# EAGLE board DressCode (EAGLE 6.4)
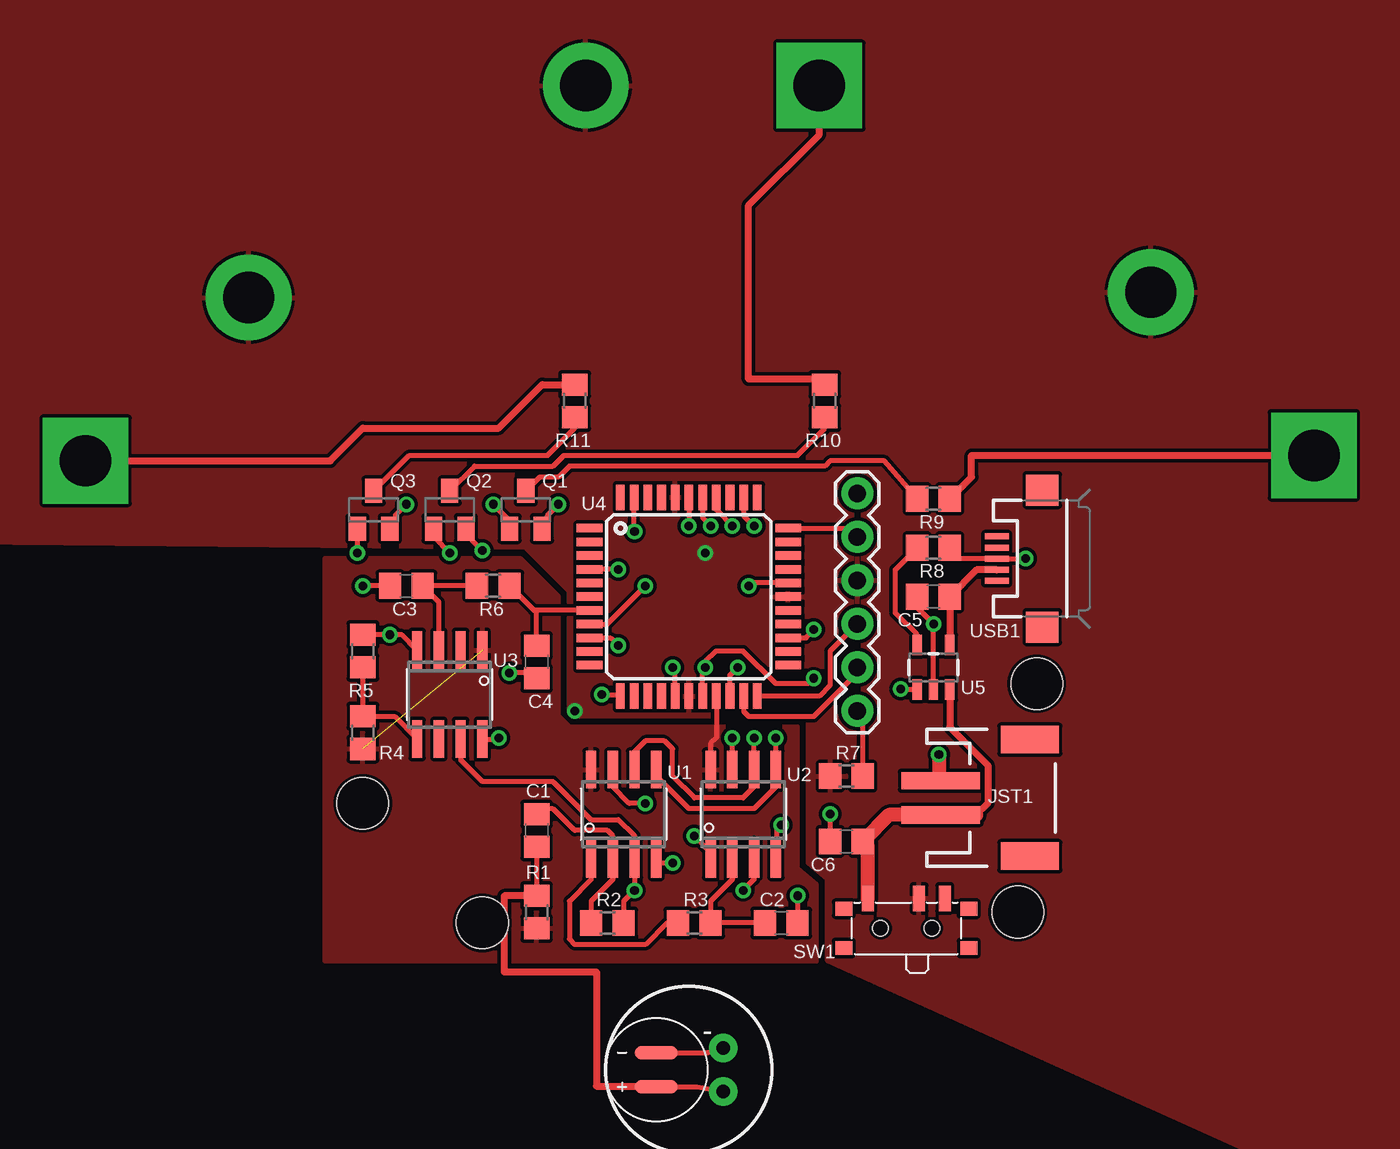
[diagram p0: board, top side]
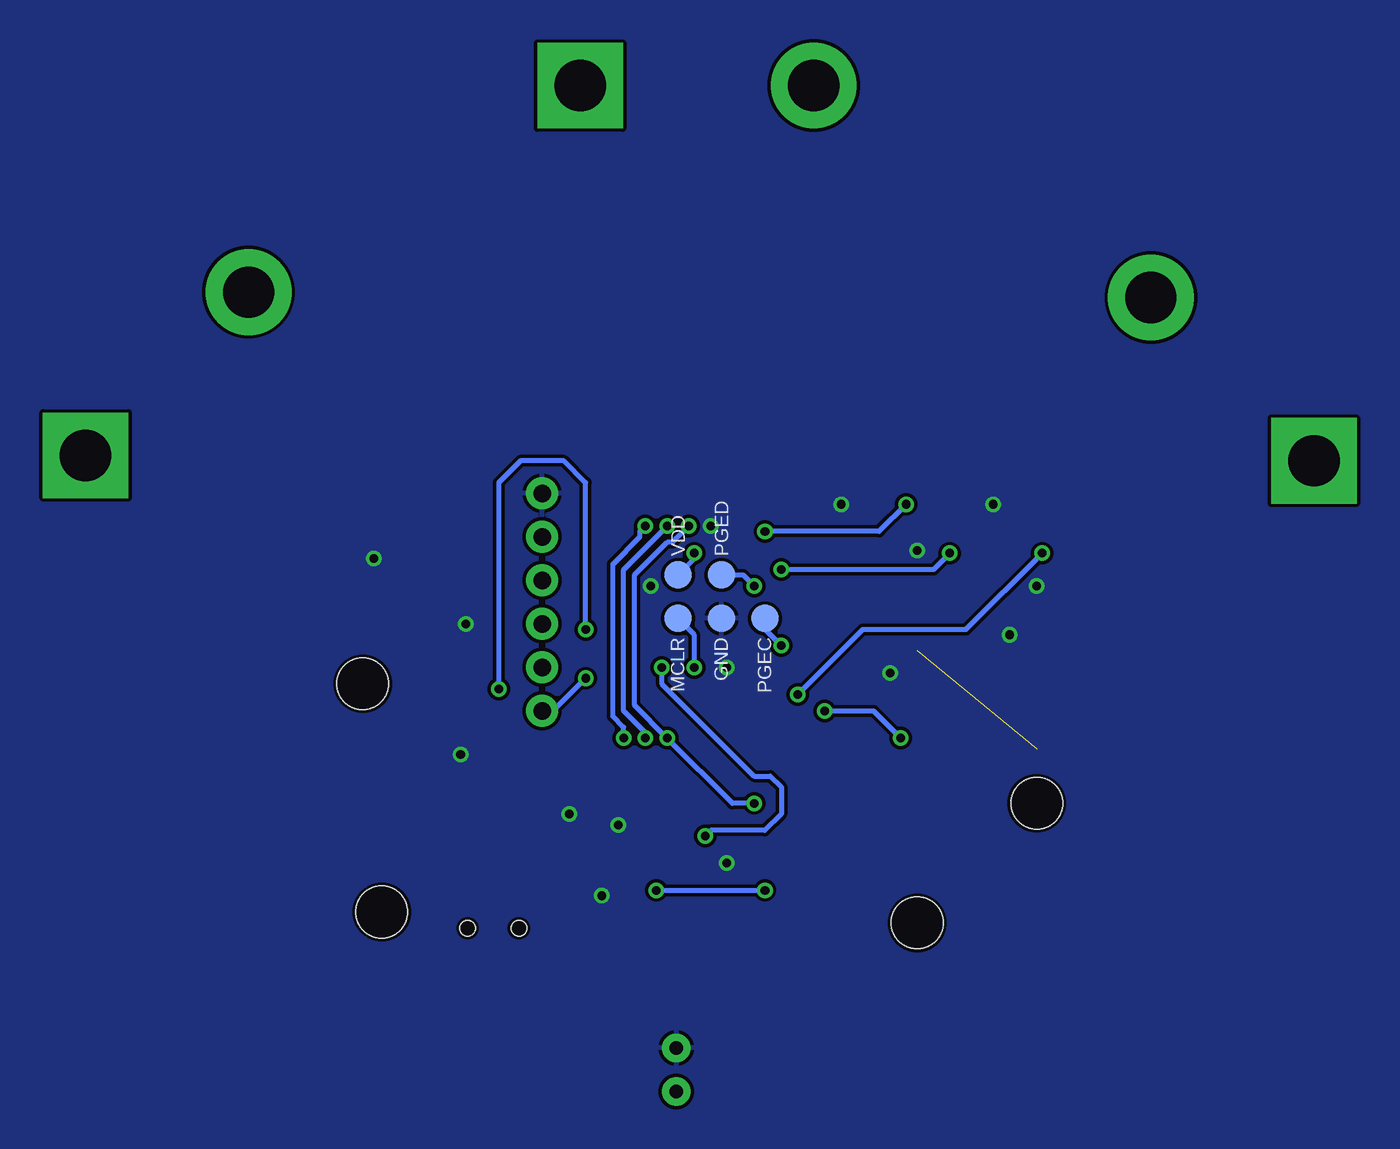
[diagram p1: board, bottom side, seen from below]

No outline drawn. Coordinates in mm, seen from the top.
Copper layers (1*16): Top 0.035mm / dielectric 1.5mm / Bottom 0.035mm
Design rules "default *": minimum track width 0.2mm, minimum drill 0.5mm, track to track 0.2mm, track to pad 0.2mm, pad to pad 0.2mm, via to via 0.2mm, smd to smd 0.2mm, copper to edge 0.2mm, drill to drill 0.3mm, minimum pad ring 10mil, minimum via ring 8mil, stop-mask expansion 4mil, vias tented up to drill 1mm, thermal gap 0.2mm
Holes 3 mm at 29.84,26.04 36.83,19.05 68.1,19.68 69.22,33.02

## Footprints (pad centres in the part's own frame; a part is rotated, then mirrored left to right if it is on the bottom)
C0805 = smd 1.3 x 1.5: 1 -0.95,0; 2 0.95,0
TP16R = smd 1.6 x 1.6: TP 0,0
1X06 = drill 1.016 pad 1.88: 1 0,0; 2 2.54,0; 3 5.08,0; 4 7.62,0; 5 10.16,0; 6 12.7,0
JST-2-SMD = smd 1 x 4.6: 1 -1,-3.7; 2 1,-3.7 | smd 1.6 x 3.4: NC1 -3.4,1.5; NC2 3.4,1.5
MIC-9.7MM = drill 0.8 pad 1.676: 1 -2,1.27; 2 -2,-1.27
MIC-SMD = smd 2.5 x 0.8: + 0,-1; - 0,1
SOT23 = smd 1 x 1.4: 1 -0.95,-1.1; 2 0.95,-1.1; 3 0,1.1
R0805 = smd 1.3 x 1.5: 1 -0.95,0; 2 0.95,0
PCM12SMTR = smd 0.7 x 1.5: 1 -2.25,1.75; 2 0.75,1.75; 3 2.25,1.75 | smd 1 x 0.8: A -3.65,-1.15; B -3.65,1.15; C 3.65,1.15; D 3.65,-1.15 | hole 0.9: 1.5,0; -1.5,0
SOIC-8 = smd 0.6 x 2.2: 1 -1.905,-2.6; 2 -0.635,-2.6; 3 0.635,-2.6; 4 1.905,-2.6; 5 1.905,2.6; 6 0.635,2.6; 7 -0.635,2.6; 8 -1.905,2.6
TQFP44 = smd 1.5 x 0.5: 1 -5.8,4; 2 -5.8,3.2; 3 -5.8,2.4; 4 -5.8,1.6; 5 -5.8,0.8; 6 -5.8,0; 7 -5.8,-0.8; 8 -5.8,-1.6; 9 -5.8,-2.4; 10 -5.8,-3.2; 11 -5.8,-4; 23 5.8,-4; 24 5.8,-3.2; 25 5.8,-2.4; 26 5.8,-1.6; 27 5.8,-0.8; 28 5.8,0; 29 5.8,0.8; 30 5.8,1.6; 31 5.8,2.4; 32 5.8,3.2; 33 5.8,4 | smd 0.5 x 1.5: 12 -4,-5.8; 13 -3.2,-5.8; 14 -2.4,-5.8; 15 -1.6,-5.8; 16 -0.8,-5.8; 17 0,-5.8; 18 0.8,-5.8; 19 1.6,-5.8; 20 2.4,-5.8; 21 3.2,-5.8; 22 4,-5.8; 34 4,5.8; 35 3.2,5.8; 36 2.4,5.8; 37 1.6,5.8; 38 0.8,5.8; 39 0,5.8; 40 -0.8,5.8; 41 -1.6,5.8; 42 -2.4,5.8; 43 -3.2,5.8; 44 -4,5.8
SOT23-5 = smd 0.55 x 1.2: 1 -0.95,-1.3; 2 0,-1.3; 3 0.95,-1.3; 4 0.95,1.3; 5 -0.95,1.3
DRESSCODE_SEW_PAD_CIRC = drill 3 pad 5: 1 0,0
DRESSCODE_SEW_PAD_SQR = drill 3 pad 5 square: 1 0,0
USB-MICROB = smd 0.35 x 1.4: D+ 0,2.65; D- -0.65,2.65; GND 1.3,2.65; ID 0.65,2.65; VBUS -1.3,2.65 | smd 1.8 x 1.9: MT1 -4,0; MT2 4,0

## Placement (x,y rotation side)
C1  10u  [C0805]  40.01,24.45 90 top
C2  10n  [C0805]  54.29,19.05 0 top
C3  10u  [C0805]  32.38,38.73 0 top
C4  10u  [C0805]  40.01,34.29 90 top
C5  10u  [C0805]  63.18,38.1 0 top
C6  10u  [C0805]  58.1,23.81 0 top
GND  TPTP16R  [TP16R]  48.26,36.83 90 bottom
JP1  [1X06]  58.74,44.13 270 top
JST1  [JST-2-SMD]  67.31,26.35 270 top
M1  MIC9.7MM  [MIC-9.7MM]  48.9,10.48 180 top
M2  MIC6MM  [MIC-SMD]  46.99,10.48 0 top
MCLR  TPTP16R  [TP16R]  50.8,36.83 90 bottom
PGEC  TPTP16R  [TP16R]  45.72,36.83 90 bottom
PGED  TPTP16R  [TP16R]  48.26,39.37 90 bottom
Q1  2N7002  [SOT23]  39.37,43.18 0 top
Q2  2N7002  [SOT23]  34.92,43.18 0 top
Q3  2N7002  [SOT23]  30.48,43.18 0 top
R1  2.2k  [R0805]  40.01,19.68 270 top
R2  2.2k  [R0805]  44.13,19.05 0 top
R3  2.2k  [R0805]  49.21,19.05 0 top
R4  2.2k  [R0805]  29.84,30.16 270 top
R5  2.2k  [R0805]  29.84,34.92 270 top
R6  2.2k  [R0805]  37.47,38.73 180 top
R7  2.2k  [R0805]  58.1,27.62 180 top
R8  2.2k  [R0805]  63.18,40.96 180 top
R9  100R  [R0805]  63.18,43.81 0 top
R10  100R  [R0805]  56.83,49.53 90 top
R11  100R  [R0805]  42.23,49.53 90 top
SW1  PCM12SMTR  [PCM12SMTR]  61.59,18.73 0 top
U1  MCP6S21  [SOIC-8]  45.09,25.4 0 top
U2  MCP6S21  [SOIC-8]  52.07,25.4 0 top
U3  MCP6G02  [SOIC-8]  34.92,32.38 180 top
U4  PIC24FV32KA304-I/PT  [TQFP44]  48.9,38.1 0 top
U5  MCP73832T-2ACI/OT  [SOT23-5]  63.18,33.97 0 top
U$1  [OSHW_LOGO_6MM_BOTTOM]  69.53,25.72 0 bottom
U$2  [DRESSCODE-OUTLINE1]  6.67,2.86 0 top
U$4  DRESSCODE_SEW_PADC  [DRESSCODE_SEW_PAD_CIRC]  75.88,55.88 0 top
U$5  DRESSCODE_SEW_PADC  [DRESSCODE_SEW_PAD_CIRC]  23.18,55.56 90 top
U$6  DRESSCODE_SEW_PADC  [DRESSCODE_SEW_PAD_CIRC]  42.86,67.94 90 top
U$7  DRESSCODE_SEW_PADS  [DRESSCODE_SEW_PAD_SQR]  85.41,46.35 90 top
U$8  DRESSCODE_SEW_PADS  [DRESSCODE_SEW_PAD_SQR]  56.52,67.94 0 top
U$9  [DRESSCODE_LOGO]  31.29,21.18 0 top
U$10  DRESSCODE_SEW_PADS  [DRESSCODE_SEW_PAD_SQR]  13.65,46.04 0 top
USB1  USB-MICROB  [USB-MICROB]  69.53,40.32 90 top
VDD  TPTP16R  [TP16R]  50.8,39.37 90 bottom

## Library data of the parts
C1-C6 R1-R11 = rcl
GND MCLR PGEC PGED VDD = testpad
JP1 M1 = SparkFun
JST1 U5 USB1 = SparkFun_08_2011
M2 U1-U4 U$1 U$4-U$10 = x-io
Q1-Q3 = transistor-small-signal
SW1 = SparkFun0modified
U$2 = hannah

## Nets
ADC: U2.1 U4.20
AVDD: R1.2 R4.2 U1.8 U2.8 U3.1 U4.19
AVDD_REF: C4.2 R6.1 U4.7
BATT: C6.2 JST1.2 SW1.1 U5.3
CS: U1.5 U2.5 U4.35
FTDI_RX: JP1.5 U4.21
FTDI_TX: JP1.4 U4.22
GND: C2.2 C3.1 C4.1 C5.1 C6.1 GND.TP JP1.1 JST1.1 M1.2 M2.- Q1.2 Q2.2 Q3.2 R5.1 R8.1 U1.4 U2.4 U3.4 U4.16 U4.29 U4.39 U5.2 USB1.D+
MCLR: JP1.6 MCLR.TP R7.1 U4.18
N$1: C1.1 M1.1 M2.+ R1.1
N$2: C1.2 R2.1 U1.2
N$3: C2.1 R3.2 U2.2
N$4: R3.1 U1.1
N$5: C3.2 R6.2 U3.3
N$6: R4.1 R5.2 U3.5
N$9: Q1.3 R9.1
N$10: Q2.3 R10.1
N$11: Q3.3 R11.1
N$12: R9.2 U$7.1
N$13: R10.2 U$8.1
N$14: R11.2 U$10.1
N$15: R8.2 U5.5
PGEC: PGEC.TP U4.9
PGED: PGED.TP U4.8
PWM1: Q1.1 U4.43
PWM2: Q2.1 U4.4
PWM3: Q3.1 U4.12
RB4: JP1.2 U4.33
SI: U1.6 U2.6 U4.37
SLK: U1.7 U2.7 U4.38
STAT: U4.25 U5.1
USB1: C5.2 U5.4 USB1.D-
VDD: JP1.3 R7.2 SW1.2 U3.8 U4.17 U4.28 U4.40 U$4.1 U$5.1 U$6.1 VDD.TP
VREF: R2.2 U1.3 U2.3 U3.7

## Tracks (layer width: path | path; a pad name or v marks a point on that pad's centre or on a via)
ADC  (via drill 0.5)
  Top 0.305: U4.20 51.3,33.52 v51.75,33.97 | U2.1 50.16,23.18 v49.21,24.13
  Bottom 0.305: v51.75,33.97 51.75,33.02 46.35,27.62 45.4,27.62 44.77,26.99 44.77,25.4 45.72,24.45 48.9,24.45 v49.21,24.13
AVDD  (1 unrouted)
  Top 0.305: U4.19 50.49,29.86 50.16,29.53 U2.8
  pour Top: 27.62,16.83 56.36,16.83 56.36,21.27 55.24,22.23 55.24,30.48 41.91,30.48 41.27,31.11 41.27,38.1 39.05,40.32 27.62,40.32
AVDD_REF
  Top 0.305: U4.7 40.01,37.3 | 40.01,37.3 39.85,37.3 R6.1 | C4.2 40.01,37.3
BATT
  Top 0.406: U5.3 64.13,30.48 66.36,28.26 66.36,26.04 65.67,25.35
  Top 0.813: SW1.1 59.34,23.52 C6.2 60.59,25.35 JST1.2 65.67,25.35
CS  (via drill 0.5)
  Top 0.305: U4.35 52.09,42.84 v52.7,42.23 | v53.98,29.84 U2.5 53.98,26.99 52.7,25.72 48.9,25.72 46.99,27.62 U1.5
  Bottom 0.305: v53.98,29.84 53.98,30.48 54.61,31.11 54.61,40.01 53.02,41.59 53.02,41.91 v52.7,42.23
FTDI_RX
  Top 0.305: U4.21 52.09,31.41 52.39,31.11 56.2,31.11 58.42,33.34 58.42,33.66 JP1.5
FTDI_TX
  Top 0.305: JP1.4 57.15,34.92 57.15,32.94 56.52,32.3 U4.22
GND  (via drill 0.5)
  Top 0.305: C3.1 v29.84,38.73 | U4.39 v48.9,42.23 | U4.16 48.09,33.82 v47.94,33.97 | Q3.2 31.75,42.4 31.75,42.86 v32.38,43.5 | Q2.2 36.2,42.4 36.2,41.43 v36.83,40.8 | Q1.2 40.64,42.4 40.64,42.86 v41.27,43.5 | v47.94,22.54 47.25,22.54 U1.4 | U2.4 54.03,22.86 54.03,24.51 v54.29,24.77 | v55.24,20.64 C2.2 | M2.- 49.99,11.48 M1.2 | C4.1 39.69,33.66 v38.42,33.66 | U3.4 32.13,35.88 v31.43,35.88 | v31.43,35.88 R5.1 | U4.29 52.55,38.9 arc90 v52.39,38.73 | v68.58,40.32 USB1.D+ 64.77,40.32 R8.1 | 57.47,23.81 C6.1 v57.15,25.4 | v31.43,35.88 | U5.2 v63.18,36.51 62.23,37.46 C5.1
  Top 0.813: v63.5,28.89 63.5,27.46 JST1.1
  pour Bottom: 6.67,3.17 90.49,1.91 93.03,76.83 5.71,75.25
MCLR  (via drill 0.5)
  Top 0.305: U4.18 49.7,33.81 v49.85,33.97 49.85,34.29 50.48,34.92 52.07,34.92 53.98,33.02 55.88,33.02 v56.2,33.34 | R7.1 59.05,31.12 JP1.6
  Bottom 0.305: v49.85,33.97 49.85,35.88 MCLR.TP | v56.2,33.34 58.1,31.43 JP1.6
N$1
  Top 0.305: C1.1 R1.1 | M2.+ 49.35,9.48 M1.1
  Top 0.406: R1.1 38.1,20.64 38.1,16.19 43.5,16.19 43.5,9.53 46.99,9.53 M2.+
N$2
  Top 0.305: 43.5,19.36 R2.1 43.18,20.32 44.45,21.59 U1.2 44.45,24.13 44.13,24.45 42.23,24.45 40.96,25.71 40.32,25.71 C1.2
N$3
  Top 0.305: C2.1 R3.2 50.16,20.32 51.44,21.59 U2.2
N$4
  Top 0.305: R3.1 47.62,19.05 46.35,17.78 42.23,17.78 41.91,18.1 41.91,20.32 43.18,21.59 U1.1
N$5
  Top 0.305: U3.3 34.29,37.78 C3.2 R6.2
N$6
  Top 0.305: R5.2 R4.1 31.69,31.11 U3.5
N$9
  Top 0.305: R9.1 60.33,46.04 57.15,46.04 56.83,45.72 41.91,45.72 41.27,45.09 40.17,45.09 Q1.3
N$10
  Top 0.305: Q2.3 36.37,45.72 40.96,45.72 41.59,46.35 55.24,46.35 56.83,47.94 R10.1
N$11
  Top 0.305: Q3.3 32.55,46.35 40.64,46.35 42.23,47.94 R11.1
N$12
  Top 0.406: R9.2 65.41,45.09 65.41,46.35 U$7.1
N$13
  Top 0.406: R10.2 56.51,50.8 52.39,50.8 52.39,60.96 56.52,65.09 U$8.1
N$14
  Top 0.406: U$10.1 27.94,46.04 29.84,47.94 37.78,47.94 40.32,50.48 R11.2
N$15
  Top 0.305: U5.5 62.23,35.88 60.96,37.15 60.96,39.69 R8.2
PGEC  (via drill 0.5)
  Top 0.305: U4.9 44.31,35.7 v44.77,35.24
  Bottom 0.305: v44.77,35.24 45.72,36.2 PGEC.TP
PGED  (via drill 0.5)
  Top 0.305: U4.8 44.12,36.5 v46.35,38.73
  Bottom 0.305: PGED.TP 46.99,39.37 v46.35,38.73
PWM1  (via drill 0.5)
  Top 0.305: Q1.1 38.42,42.54 v37.47,43.5 | v45.72,41.91 45.7,41.94 U4.43
  Bottom 0.305: v37.47,43.5 39.05,41.91 v45.72,41.91
PWM2  (via drill 0.5)
  Top 0.305: v44.77,39.69 44.76,39.7 U4.4 | Q2.1 33.98,41.59 v34.92,40.64
  Bottom 0.305: v44.77,39.69 35.88,39.69 v34.92,40.64
PWM3  (via drill 0.5)
  Top 0.305: Q3.1 v29.53,40.64 | v43.81,32.38 44.81,32.38 U4.12
  Bottom 0.305: v43.81,32.38 40.01,36.2 33.97,36.2 v29.53,40.64
RB4
  Top 0.305: U4.33 58.23,42.1 JP1.2
SI  (via drill 0.5)
  Top 0.305: U4.37 50.49,43.17 v51.44,42.23 | v52.7,29.84 U2.6 52.7,26.99 52.07,26.35 49.21,26.35 47.94,27.62 47.94,29.21 47.47,29.69 46.35,29.69 45.72,29.05 U1.6
  Bottom 0.305: v52.7,29.84 52.7,30.16 53.98,31.43 53.98,39.69 v51.44,42.23
SLK  (via drill 0.5)
  Top 0.305: U4.38 49.7,42.7 v50.16,42.23 | U2.7 v51.44,29.84 | v46.35,26.04 45.4,26.04 44.45,26.99 U1.7
  Bottom 0.305: v50.16,42.23 51.12,41.27 51.44,41.27 53.34,39.37 53.34,31.75 v51.44,29.84 47.62,26.04 v46.35,26.04
STAT  (via drill 0.5)
  Top 0.305: U4.25 55.74,35.7 v56.2,36.2 | v61.28,32.7 62.2,32.7 U5.1
  Bottom 0.305: v56.2,36.2 56.2,44.77 57.47,46.04 60.01,46.04 61.28,44.77 v61.28,32.7
USB1
  Top 0.406: U5.4 C5.2 65.7,39.67 USB1.D-
VDD  (via drill 0.5)
  Top 0.305: U3.8 37.72,29.79 v37.78,29.84
  Bottom 0.305: v42.23,31.43 39.37,31.43 v37.78,29.84 | v49.85,40.64 49.85,40.32 VDD.TP
  pour Top: 90.81,1.59 56.99,16.83 56.99,21.59 55.88,22.54 55.88,31.11 42.23,31.11 41.91,31.43 41.91,38.42 39.37,40.96 6.35,41.27 5.71,75.25 93.03,76.83
VREF  (via drill 0.5)
  Top 0.305: 52.7,23.81 U2.3 52.7,21.59 v52.07,20.95 | U3.7 35.56,28.57 36.83,27.3 40.96,27.3 43.18,25.08 44.77,25.08 45.72,24.13 U1.3 v45.72,20.95 45.09,20.32 R2.2
  Bottom 0.305: v52.07,20.95 v45.72,20.95

## Text on the board
_tsilk: one | two | three | GND | FTDI | ON-OFF | DressCode v1.0
_bsilk: one | two | three | DressCode v1.0 | Seb Madgwick | ON | OFF